# Altium PCB 飞控第二代.PcbDoc (part 2 of 2)
Units mm, origin at the board's own origin, x right, y up, seen from the top; angles counter-clockwise.
Board outline 41.02 x 41.02 mm, 2 copper layers (Top Layer, Bottom Layer); 37 components, 89 nets, 240 pads, 89 vias.
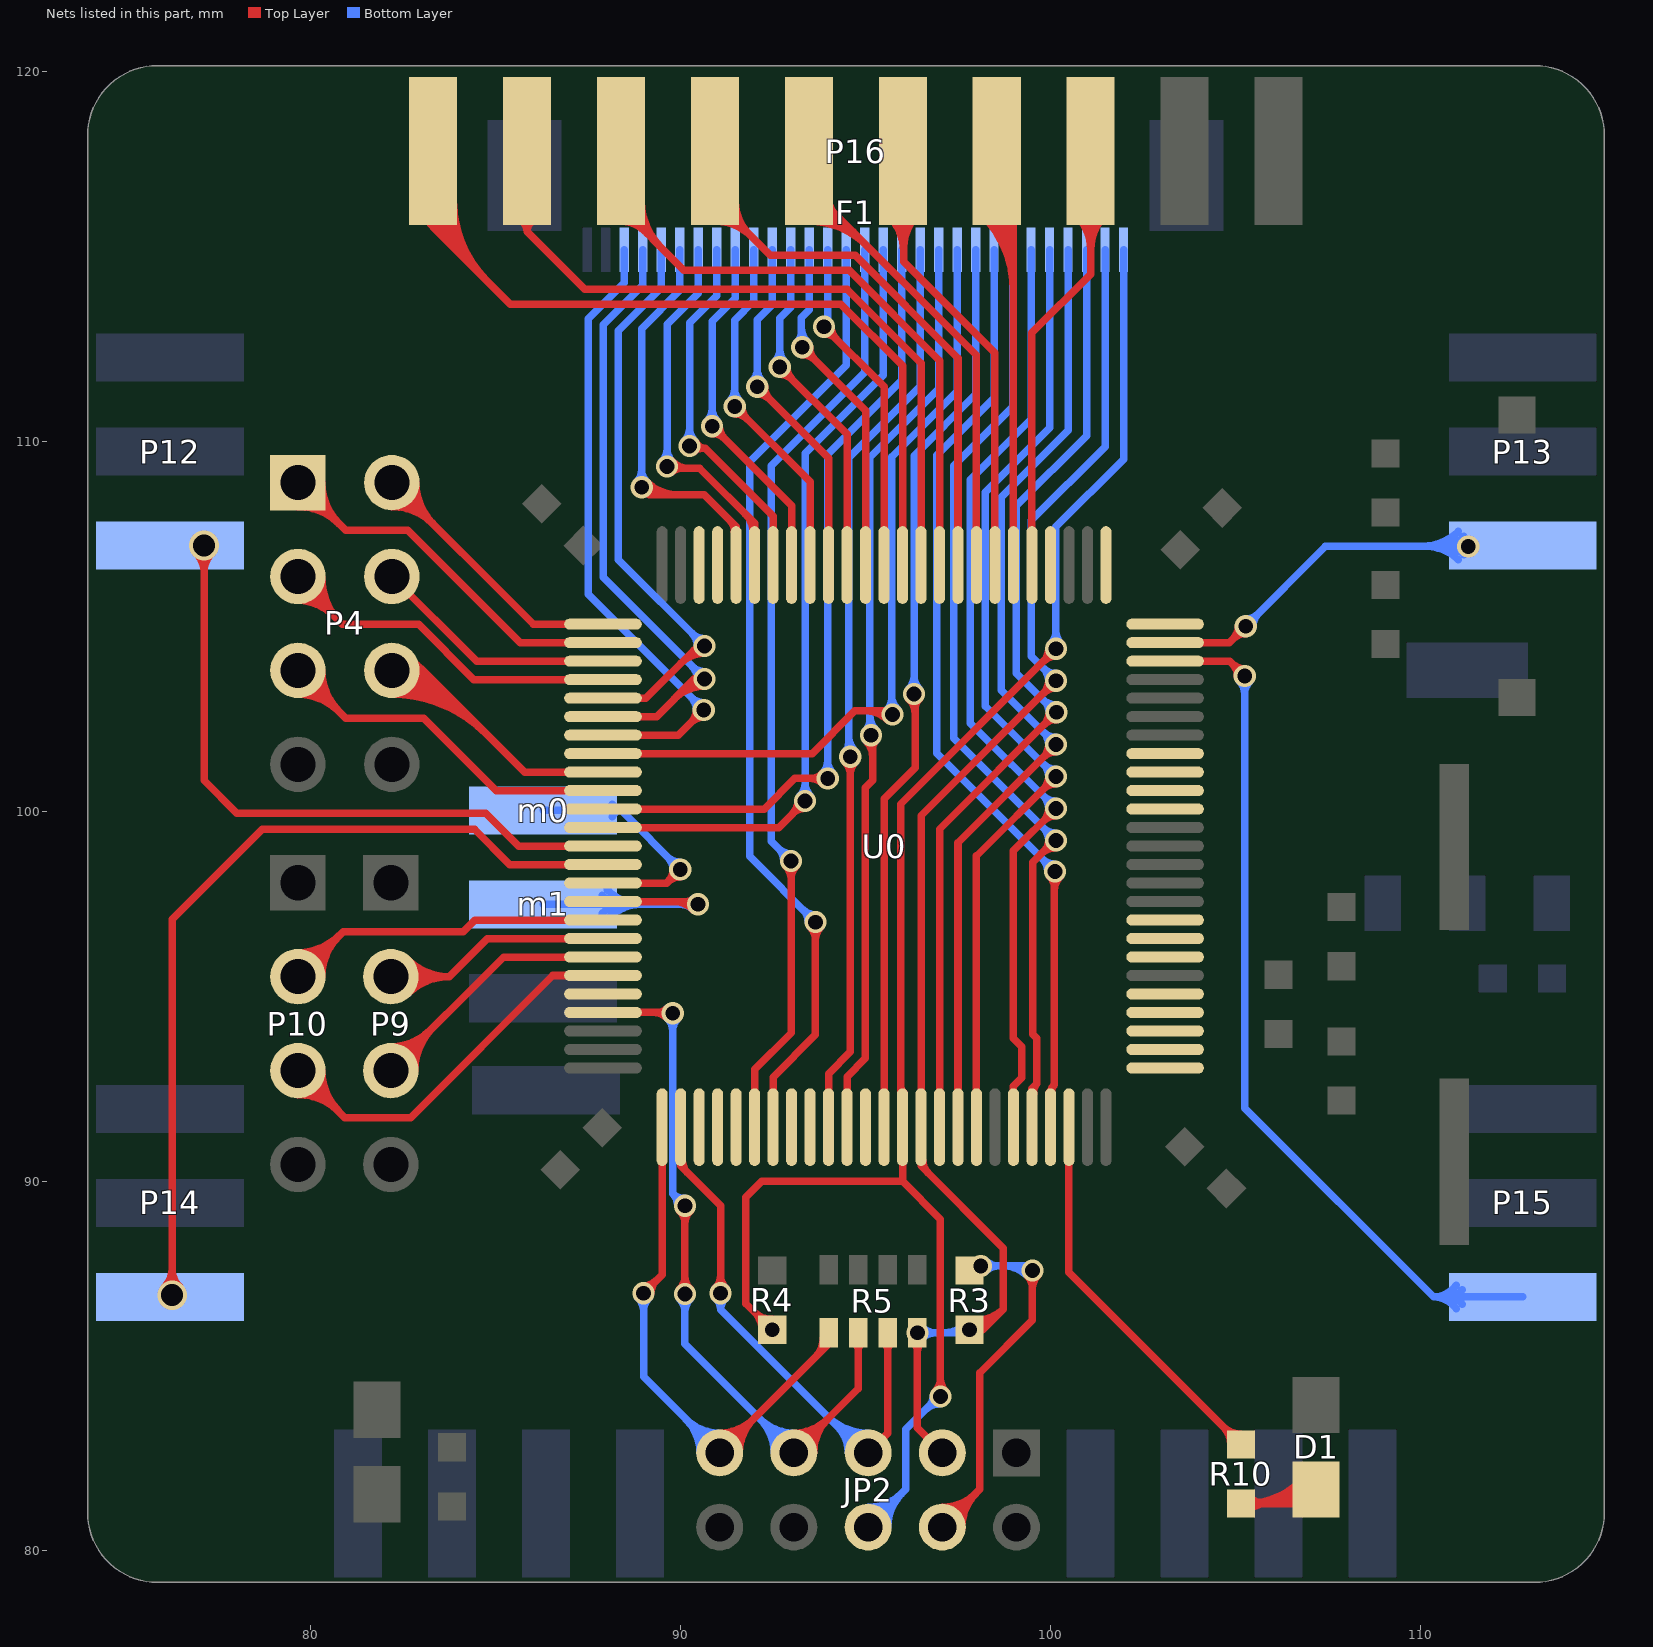
[diagram p2: the nets of this part, all layers, seen from the top]

## Via types
v1: diameter 0.6, hole 0.4, Top Layer to Bottom Layer, tented both sides, 74 vias
v2: diameter 0.8, hole 0.6, Top Layer to Bottom Layer, tented both sides, 11 vias
v3: diameter 5, hole 3.2, Top Layer to Bottom Layer, 4 vias

## Nets (pads, with @x,y where several pads share a name; then routed paths per layer and width w, separated by ;. In a path a pad name is that pad's centre, name@x,y a point inside that pad or via, vN(x,y) a via of type N, cw(c..) or ccw(c..) an arc to the next point about the centre after c; other vN are vias at no path point) (continued)
NetD1_1: D1.1 R10.1 | length 7
  Top Layer w0.203: R10.1@105.156,81.28 D1.1@106.807,81.28 ; R10.1@105.287,81.28 ccw(c105.287,83.435) D1.1@106.811,81.911 ; R10.1@105.354,81.082 cw(c105.831,80.605) 105.831,81.28 cw(c105.831,81.955) R10.1@105.354,81.478 ; 105.778,81.28 ccw(c105.778,82.944) D1.1@106.955,81.767 ; 106.268,81.28 ccw(c106.268,82.454) D1.1@107.098,81.624 ; 106.513,81.28 cw(c106.513,80.859) D1.1@106.811,81.157
NetJP2_4: JP2.4 R3.1 | length 15
  Top Layer w0.203: JP2.4@97.079,80.645 98.095,81.661 98.095,84.811 99.517,86.233 v1(99.517,87.579) ; JP2.4@97.079,80.975 ccw(c97.079,81.772) 97.642,81.209 ccw(c98.206,80.645) JP2.4@97.409,80.645 ; JP2.4@97.079,81.178 ccw(c97.079,82.466) 97.989,81.556 ccw(c98.9,80.645) JP2.4@97.612,80.645 ; v1@99.377,87.439 cw(c99.038,87.1) 99.517,87.1 cw(c99.996,87.1) v1@99.657,87.439
  Bottom Layer w0.203: v1(98.12,87.706) v1@99.39,87.706 ; v1@98.26,87.566 cw(c98.599,87.227) 98.599,87.706 cw(c98.599,88.185) v1@98.26,87.846 ; 98.732,87.706 cw(c98.732,86.794) v1@99.377,87.439 ; 99.222,87.706 cw(c99.222,87.284) v1@99.521,87.583
PA0: P15.1 U0.23 | length 27.5
  Top Layer w0.203: U0.23@103.104,104.06 104.855,104.06 v1(105.258,103.657) ; v1@105.059,103.657 ccw(c104.58,103.657) 104.919,103.996 ccw(c105.258,104.335) v1@105.258,103.856
  Bottom Layer w0.203: v1@105.117,103.517 cw(c104.779,103.178) 105.258,103.178 cw(c105.737,103.178) v1@105.398,103.517 ; v1(105.258,103.657) 105.258,91.973 110.363,86.868 ; P15.1@110.979,86.55 ccw(c110.363,86.112) 110.363,86.868 ; P15.1@110.979,87.186 cw(c110.363,87.624) 110.363,86.868 ; P15.1@111.145,86.668 ccw(c110.757,86.392) 110.757,86.868 ccw(c110.757,87.344) P15.1@111.145,87.068 ; P15.1@112.776,86.868 110.363,86.868
PA1: P13.1 U0.24 | length 14.9
  Top Layer w0.203: U0.24@103.104,104.56 104.839,104.56 v1(105.283,105.004) ; v1@105.085,105.004 cw(c104.606,105.004) 104.944,104.665 cw(c105.283,104.326) v1@105.283,104.805
  Bottom Layer w0.203: v1(105.283,105.004) 107.442,107.163 v1(111.303,107.163) ; v1@105.283,105.202 ccw(c105.283,105.681) 105.622,105.342 ccw(c105.96,105.004) v1@105.481,105.004 ; 110.041,107.163 ccw(c110.041,108.573) P13.1@111.038,107.576 ; 110.163,107.163 cw(c110.163,105.925) P13.1@111.038,106.8 ; 110.531,107.163 ccw(c110.531,108.083) P13.1@111.182,107.432 ; 110.654,107.163 cw(c110.654,106.416) P13.1@111.182,106.944 ; P13.1@111.163,107.022 ccw(c110.824,106.684) 110.824,107.163 ccw(c110.824,107.642) P13.1@111.163,107.303
PA2: U0.25
PA3: U0.26
PA4: U0.29
PA5: P16.8 U0.30 | length 15.2
  Top Layer w0.203: U0.30@99.504,106.66 99.504,112.941 101.092,114.529 P16.8@101.092,117.856 ; P16.8@100.704,116.118 cw(c99.768,115.182) 101.092,115.182 cw(c102.416,115.182) P16.8@101.48,116.118 ; P16.8@100.848,116.262 cw(c100.259,115.673) 101.092,115.673 cw(c101.925,115.673) P16.8@101.336,116.262
PA6: P16.7 U0.31 | length 18.1
  Top Layer w0.203: P16.7@98.164,116.118 cw(c96.137,114.091) 99.004,114.091 ; P16.7@98.308,116.262 cw(c96.627,114.581) 99.004,114.581 ; P16.7@98.452,116.406 cw(c97.118,115.072) 99.004,115.072 ; P16.7@98.552,117.856 99.004,117.404 U0.31@99.004,106.66 ; P16.7@98.595,116.549 cw(c97.609,115.563) 99.004,115.563
PA7: P16.6 U0.32 | length 15.8
  Top Layer w0.203: P16.6@95.624,116.118 cw(c94.627,115.121) 96.037,115.121 ; P16.6@95.768,116.262 cw(c95.117,115.611) 96.037,115.611 ; 96.037,115.243 cw(c97.275,115.243) P16.6@96.4,116.118 ; 96.037,115.734 cw(c96.784,115.734) P16.6@96.256,116.262 ; P16.6@96.52,117.856 96.037,117.373 96.037,114.865 98.504,112.398 U0.32@98.504,106.66
PA8: P10.2 U0.67 | length 13
  Top Layer w0.203: P10.2@79.654,95.529 80.874,96.749 84.125,96.749 84.436,97.06 U0.67@87.904,97.06 ; P10.2@79.654,95.975 ccw(c79.654,97.049) 80.414,96.289 ccw(c81.174,95.529) P10.2@80.1,95.529 ; P10.2@79.654,96.178 ccw(c79.654,97.743) 80.761,96.636 ccw(c81.868,95.529) P10.2@80.303,95.529
PA9: P9.2 U0.68 | length 10.3
  Top Layer w0.203: P9.2@82.167,95.529 83.744,95.529 84.774,96.56 U0.68@87.904,96.56 ; P9.2@82.482,95.215 cw(c83.242,94.455) 83.242,95.529 cw(c83.242,96.604) P9.2@82.482,95.844 ; P9.2@82.626,95.071 cw(c83.733,93.964) 83.733,95.529 cw(c83.733,97.095) P9.2@82.626,95.988
PA10: P9.3 U0.69 | length 11.2
  Top Layer w0.203: P9.3@82.167,92.989 82.167,93.013 85.214,96.06 U0.69@87.904,96.06 ; P9.3@82.167,93.435 ccw(c82.167,94.452) 82.887,93.733 ; P9.3@82.167,93.638 ccw(c82.167,95.146) 83.234,94.079 ; P9.3@82.613,92.989 cw(c83.745,92.989) 82.944,93.79 ; P9.3@82.816,92.989 cw(c84.439,92.989) 83.291,94.137
PA11: P10.3 U0.70 | length 14.5
  Top Layer w0.203: P10.3@79.654,92.341 cw(c79.654,90.776) 80.761,91.883 cw(c81.868,92.989) P10.3@80.303,92.989 ; P10.3@79.654,92.544 cw(c79.654,91.469) 80.414,92.229 cw(c81.174,92.989) P10.3@80.1,92.989 ; P10.3@79.654,92.989 80.924,91.719 82.702,91.719 86.543,95.56 U0.70@87.904,95.56
PA12: U0.71
PA13: JP2.7 R5.2 U0.72 | length 30.7
  Top Layer w0.203: U0.72@87.904,94.56 v1@89.789,94.56 ; 89.259,94.56 cw(c89.259,94.009) v1@89.649,94.399 ; 89.361,94.56 ccw(c89.361,94.967) v1@89.649,94.679 ; v1@89.979,87.084 ccw(c89.64,87.423) 90.119,87.423 ccw(c90.598,87.423) v1@90.259,87.084 ; v1@89.979,89.192 cw(c89.64,88.853) 90.119,88.853 cw(c90.598,88.853) v1@90.259,89.192 ; v1(90.119,86.944) v1(90.119,89.332) ; JP2.7@93.066,82.652 94.805,84.391 R5.2@94.805,85.897 ; JP2.7@93.066,82.982 ccw(c93.066,83.779) 93.629,83.215 ccw(c94.193,82.652) JP2.7@93.396,82.652 ; JP2.7@93.066,83.185 ccw(c93.066,84.473) 93.976,83.562 ccw(c94.887,82.652) JP2.7@93.599,82.652 ; R5.2@94.7,85.642 cw(c94.447,85.389) 94.805,85.389 cw(c95.164,85.389) R5.2@94.91,85.642
  Bottom Layer w0.203: v1@89.649,94.399 cw(c89.31,94.06) 89.789,94.06 cw(c90.268,94.06) v1@89.929,94.399 ; v1(89.789,94.539) 89.789,89.662 ; v1@89.921,89.335 ccw(c89.471,89.344) 89.789,89.662 ; v1@89.979,86.804 cw(c89.64,86.465) 90.119,86.465 cw(c90.598,86.465) v1@90.259,86.804 ; v1@90.116,89.53 cw(c90.107,89.98) 89.789,89.662 ; v1(90.119,86.944) 90.119,85.598 JP2.7@93.066,82.652 ; v1(90.119,89.332) 89.789,89.662 ; JP2.7@92.532,82.652 ccw(c91.244,82.652) 92.155,83.562 ccw(c93.066,84.473) JP2.7@93.066,83.185 ; JP2.7@92.735,82.652 ccw(c91.938,82.652) 92.502,83.215 ccw(c93.066,83.779) JP2.7@93.066,82.982
PA14: JP2.9 R5.1 U0.76 | length 23
  Top Layer w0.203: v1(89.002,86.97) 89.504,87.472 U0.76@89.504,91.46 ; v1@89.002,87.168 ccw(c89.002,87.647) 89.34,87.308 ccw(c89.679,86.97) v1@89.2,86.97 ; JP2.9@91.059,82.652 94.005,85.598 R5.1@94.005,85.897 ; JP2.9@91.059,82.982 ccw(c91.059,83.779) 91.623,83.215 ccw(c92.186,82.652) JP2.9@91.389,82.652 ; JP2.9@91.059,83.185 ccw(c91.059,84.473) 91.97,83.562 ccw(c92.88,82.652) JP2.9@91.592,82.652 ; 93.647,85.239 ccw(c93.139,85.747) R5.1@93.857,85.747
  Bottom Layer w0.203: v1@88.861,86.829 cw(c88.523,86.491) 89.002,86.491 cw(c89.481,86.491) v1@89.142,86.829 ; v1(89.002,86.97) 89.002,84.709 JP2.9@91.059,82.652 ; JP2.9@90.526,82.652 ccw(c89.238,82.652) 90.148,83.562 ccw(c91.059,84.473) JP2.9@91.059,83.185 ; JP2.9@90.729,82.652 ccw(c89.932,82.652) 90.495,83.215 ccw(c91.059,83.779) JP2.9@91.059,82.982
PA15: JP2.5 R5.3 U0.77 | length 19.7
  Top Layer w0.203: U0.77@90.004,91.46 90.004,90.412 91.084,89.332 v1(91.084,86.97) ; U0.77@90.052,90.56 ccw(c90.526,90.56) 90.191,90.225 ; v1@90.944,87.11 ccw(c90.605,87.449) 91.084,87.449 ccw(c91.563,87.449) v1@91.225,87.11 ; JP2.5@95.072,82.652 95.605,83.185 R5.3@95.605,85.897 ; R5.3@95.5,85.642 cw(c95.247,85.389) 95.605,85.389 cw(c95.964,85.389) R5.3@95.71,85.642
  Bottom Layer w0.203: v1@90.952,86.822 cw(c90.686,86.525) 91.084,86.525 ; v1(91.084,86.97) 91.084,86.525 ; v1@91.217,86.822 ccw(c91.483,86.525) 91.084,86.525 ; 93.967,83.643 ccw(c95.072,84.748) JP2.5@95.072,83.185 ; 94.242,83.367 cw(c93.527,82.652) JP2.5@94.539,82.652 ; 94.314,83.296 ccw(c95.072,84.055) JP2.5@95.072,82.982 ; JP2.5@95.072,82.652 94.958,82.652 91.084,86.525
PB0: P16.3 U0.35 | length 19.6
  Top Layer w0.203: P16.3@88.367,116.357 90.094,114.63 94.562,114.63 97.004,112.188 U0.35@97.004,106.66 ; P16.3@88.392,115.958 cw(c88.392,115.054) 89.031,115.693 ; P16.3@88.534,116.506 ccw(c89.297,116.506) P16.3@88.757,115.967 ; P16.3@88.737,116.506 ccw(c89.991,116.506) 89.104,115.62 ; P16.3@88.94,116.506 ccw(c90.684,116.506) 89.451,115.273
PB1: P16.2 U0.36 | length 20.6
  Top Layer w0.203: P16.2@85.634,116.003 cw(c85.491,115.672) 85.852,115.672 ; P16.2@85.852,117.856 85.852,115.672 ; P16.2@86.07,116.003 ccw(c86.213,115.672) 85.852,115.672 ; U0.36@96.504,106.66 96.504,112.118 94.503,114.119 87.405,114.119 85.852,115.672
PB2: P16.1 U0.37 | length 30.7
  Top Layer w0.203: P16.1@83.048,116.506 ccw(c84.117,116.506) 83.361,115.75 ; P16.1@83.251,116.506 ccw(c84.811,116.506) 83.708,115.403 ; P16.1@83.312,117.856 83.312,115.799 ; P16.1@83.454,116.506 ccw(c85.505,116.506) 84.055,115.056 ; P16.1@83.657,116.506 ccw(c86.198,116.506) 84.401,114.709 ; P16.1@83.86,116.506 ccw(c86.892,116.506) 84.748,114.362 ; U0.37@96.004,106.66 96.004,112.047 94.336,113.716 85.395,113.716 83.312,115.799 ; 83.312,115.799 cw(c83.494,115.799) 83.449,115.975 ccw(c83.494,115.799) 83.312,115.799 ; 83.312,115.799 ccw(c83.13,115.799) 83.175,115.975 cw(c83.13,115.799) 83.312,115.799
PB3: F1.1 JP2.6 R4.2 U0.89 | length 55
  Top Layer w0.203: R4.2@92.202,85.979 ccw(c91.527,85.979) 92.004,86.456 ccw(c92.481,86.933) R4.2@92.481,86.258 ; R4.2@92.283,85.979 ccw(c91.804,85.979) 92.143,86.318 ccw(c92.481,86.656) R4.2@92.481,86.177 ; v1(92.481,85.979) 91.77,86.69 91.77,89.56 92.202,89.992 96.004,89.992 ; 95.956,92.594 ccw(c96.238,92.594) U0.89@96.038,92.394 ; v1@96.888,84.316 ccw(c96.549,84.655) 97.028,84.655 ccw(c97.507,84.655) v1@97.168,84.316 ; v1(97.028,84.176) 97.028,88.968 96.004,89.992 ; v1@99.954,104.394 cw(c99.475,104.394) 99.814,104.055 cw(c100.152,103.717) v1@100.152,104.196 ; v1(100.152,104.394) 95.956,100.197 95.956,91.508 U0.89@96.004,91.46 96.004,89.992
  Bottom Layer w0.203: JP2.6@95.072,80.645 96.088,81.661 96.088,83.287 v1@97.028,84.226 ; JP2.6@95.072,80.975 ccw(c95.072,81.772) 95.636,81.209 ccw(c96.2,80.645) JP2.6@95.402,80.645 ; JP2.6@95.072,81.178 ccw(c95.072,82.466) 95.983,81.556 ccw(c96.893,80.645) JP2.6@95.606,80.645 ; 96.603,83.801 cw(c97.028,83.376) v1@97.028,83.977 ; 96.725,83.924 ccw(c96.473,84.176) v1@96.83,84.176 ; v1@100.012,104.534 ccw(c99.673,104.873) 100.152,104.873 ccw(c100.631,104.873) v1@100.292,104.534 ; v1(100.152,104.394) 100.152,107.696 101.981,109.525 F1.1@101.981,115.189
PB4: F1.2 JP2.3 R3.2 R5.4 U0.90 | length 46.4
  Top Layer w0.203: R5.4@96.265,85.757 cw(c95.926,85.418) 96.405,85.418 cw(c96.884,85.418) R5.4@96.546,85.757 ; R5.4@96.3,85.642 cw(c96.047,85.389) 96.405,85.389 cw(c96.764,85.389) R5.4@96.51,85.642 ; v1(96.405,85.897) 96.405,83.325 JP2.3@97.079,82.652 ; U0.90@96.552,90.56 ccw(c97.02,90.56) 96.689,90.229 ; R3.2@97.815,85.974 ccw(c97.839,86.763) 98.397,86.205 ; v1(97.815,85.979) R3.2@98.171,85.979 ; R3.2@97.821,86.177 ccw(c97.858,87.409) 98.73,86.538 ; R3.2@97.827,86.054 ccw(c97.94,86.764) 98.448,86.256 ; R3.2@97.859,86.255 ccw(c98.017,87.251) 98.73,86.538 ; R3.2@97.984,85.875 cw(c98.171,85.76) R3.2@98.171,85.979 ; R3.2@97.984,86.083 ccw(c98.171,86.198) R3.2@98.171,85.979 ; v1@99.954,103.53 cw(c99.475,103.53) 99.814,103.192 cw(c100.152,102.853) v1@100.152,103.332 ; v1(100.152,103.53) 96.504,99.882 U0.90@96.504,91.46 96.504,90.415 98.73,88.189 98.73,86.538 ; R3.2@98.171,85.979 98.73,86.538
  Bottom Layer w0.203: v1(96.405,85.897) v1@97.734,85.897 ; v1@96.546,85.757 cw(c96.884,85.418) 96.884,85.897 cw(c96.884,86.376) v1@96.546,86.037 ; 97.139,85.897 ccw(c97.139,86.655) v1@97.675,86.119 ; v1@99.954,103.53 ccw(c99.475,103.53) 99.814,103.869 ccw(c100.152,104.208) v1@100.152,103.729 ; v1(100.152,103.53) 99.489,104.194 99.489,107.871 101.481,109.863 F1.2@101.481,115.189
PB5: F1.3 U0.91 | length 27.8
  Top Layer w0.203: U0.91@97.004,91.46 97.004,99.519 v1(100.165,102.679) ; v1@99.967,102.679 cw(c99.488,102.679) 99.826,102.341 cw(c100.165,102.002) v1@100.165,102.481
  Bottom Layer w0.203: 99.783,103.036 ccw(c100.165,103.418) v1@100.165,102.878 ; 99.844,102.975 cw(c99.549,102.679) v1@99.967,102.679 ; v1@100.152,102.667 99.085,103.734 99.085,108.258 100.981,110.154 F1.3@100.981,115.189
PB6: F1.4 U0.92 | length 27.7
  Top Layer w0.203: U0.92@97.504,91.46 97.504,99.155 v1(100.152,101.803) ; v1@99.954,101.803 cw(c99.475,101.803) 99.814,101.465 cw(c100.152,101.126) v1@100.152,101.605
  Bottom Layer w0.203: v1@99.954,101.803 ccw(c99.475,101.803) 99.814,102.142 ccw(c100.152,102.481) v1@100.152,102.002 ; v1(100.152,101.803) 98.679,103.276 98.679,108.497 100.481,110.299 F1.4@100.481,115.189
PB7: F1.5 U0.93 | length 27.6
  Top Layer w0.203: U0.93@98.004,91.46 98.004,98.791 v1(100.152,100.94) ; v1@99.954,100.94 cw(c99.475,100.94) 99.814,100.601 cw(c100.152,100.262) v1@100.152,100.741
  Bottom Layer w0.203: v1@99.954,100.94 ccw(c99.475,100.94) 99.814,101.278 ccw(c100.152,101.617) v1@100.152,101.138 ; F1.5@99.981,115.189 99.981,110.37 98.244,108.633 98.244,102.848 v1(100.152,100.94)
PB8: F1.6 U0.95 | length 27.5
  Top Layer w0.203: U0.95@99.004,91.46 99.004,92.569 99.23,92.795 99.23,93.632 99.004,93.858 99.004,98.928 v1(100.152,100.076) ; v1@99.954,100.076 cw(c99.475,100.076) 99.814,99.737 cw(c100.152,99.399) v1@100.152,99.878
  Bottom Layer w0.203: F1.6@99.481,115.189 99.481,110.609 97.841,108.969 97.841,102.387 v1(100.152,100.076) ; v1@99.954,100.076 ccw(c99.475,100.076) 99.814,100.415 ccw(c100.152,100.753) v1@100.152,100.274
PB9: F1.7 U0.96 | length 27.7
  Top Layer w0.203: U0.96@99.504,91.46 99.504,92.499 99.633,92.628 ; U0.96@99.552,92.369 cw(c99.84,92.42) 99.633,92.628 ; 99.749,98.847 cw(c100.152,98.443) v1@100.152,99.014 ; 99.84,98.939 ccw(c99.567,99.212) v1@99.954,99.212 ; v1(100.152,99.212) 99.916,98.976 99.878,98.976 99.525,98.623 99.525,93.972 99.633,93.864 99.633,92.628
  Bottom Layer w0.203: F1.7@98.981,115.189 98.981,110.944 97.384,109.347 97.384,101.981 v1(100.152,99.212) ; v1@99.954,99.212 ccw(c99.475,99.212) 99.814,99.551 ccw(c100.152,99.89) v1@100.152,99.411
PB10: U0.47
PB11: U0.48
PB12: P4.2 U0.51 | length 11.4
  Top Layer w0.203: P4.2@82.194,108.241 cw(c82.194,106.676) 83.301,107.783 cw(c84.408,108.89) P4.2@82.843,108.89 ; P4.2@82.194,108.445 cw(c82.194,107.37) 82.954,108.13 cw(c83.714,108.89) P4.2@82.64,108.89 ; P4.2@82.194,108.89 86.024,105.06 U0.51@87.904,105.06
PB13: P4.1 U0.52 | length 14.2
  Top Layer w0.203: P4.1@79.654,108.241 cw(c79.654,106.676) 80.761,107.783 cw(c81.868,108.89) P4.1@80.303,108.89 ; P4.1@79.654,108.445 cw(c79.654,107.37) 80.414,108.13 cw(c81.174,108.89) P4.1@80.1,108.89 ; P4.1@79.654,108.89 80.95,107.594 82.626,107.594 85.661,104.56 U0.52@87.904,104.56
PB14: P4.4 U0.53 | length 6.7
  Top Layer w0.203: P4.4@82.194,106.35 84.484,104.06 U0.53@87.904,104.06
PB15: P4.3 U0.54 | length 13.5
  Top Layer w0.203: P4.3@79.604,106.299 80.848,105.054 82.92,105.054 84.414,103.56 U0.54@87.904,103.56 ; P4.3@79.654,105.701 cw(c79.654,104.381) 80.588,105.315 ; P4.3@79.654,105.905 cw(c79.654,105.075) 80.241,105.662 ; P4.3@80.099,106.34 ccw(c81.333,106.314) 80.461,105.442 ; P4.3@80.303,106.336 ccw(c81.993,106.3) 80.797,105.105
PC0: U0.15
PC1: U0.16
PC2: U0.17
PC3: U0.18
PC4: P16.5 U0.33 | length 15.7
  Top Layer w0.203: P16.5@93.472,115.958 cw(c93.472,113.778) 95.013,115.319 ; P16.5@93.472,116.161 cw(c93.472,114.472) 94.666,115.666 ; P16.5@93.472,116.364 cw(c93.472,115.166) 94.319,116.013 ; P16.5@93.98,116.352 98.004,112.328 U0.33@98.004,106.66 ; P16.5@94.02,116.506 ccw(c94.489,116.506) 94.158,116.175
PC5: P16.4 U0.34 | length 17.4
  Top Layer w0.203: P16.4@90.907,116.561 92.431,115.037 94.725,115.037 97.504,112.258 U0.34@97.504,106.66 ; P16.4@90.932,115.958 cw(c90.932,114.563) 91.918,115.549 ; P16.4@90.932,116.161 cw(c90.932,115.257) P16.4@91.571,115.896 ; P16.4@91.277,116.506 ccw(c92.04,116.506) P16.4@91.501,115.967 ; P16.4@91.48,116.506 ccw(c92.734,116.506) 91.848,115.62
PC6: P12.1 U0.63 | length 19
  Top Layer w0.203: v2@76.903,106.977 cw(c76.394,106.468) 77.114,106.468 cw(c77.835,106.468) v2@77.325,106.977 ; v2(77.114,107.188) 77.114,100.838 78.003,99.949 84.734,99.949 85.623,99.06 U0.63@87.904,99.06
PC7: P14.1 U0.64 | length 24.4
  Top Layer w0.203: v2@76.04,87.13 ccw(c75.53,87.639) 76.251,87.639 ccw(c76.971,87.639) v2@76.462,87.13 ; v2(76.251,86.919) 76.251,97.079 78.689,99.517 84.43,99.517 85.387,98.56 U0.64@87.904,98.56
PC8: m0.1 U0.65 | length 8.7
  Top Layer w0.203: U0.65@87.904,98.06 89.627,98.06 v1(89.992,98.425) ; v1@89.794,98.425 cw(c89.315,98.425) 89.654,98.086 cw(c89.992,97.748) v1@89.992,98.227
  Bottom Layer w0.203: m0.1@86.284,100.025 88.392,100.025 ; m0.1@88.155,99.854 cw(c88.392,99.775) 88.392,100.025 ; m0.1@88.155,100.197 ccw(c88.392,100.275) 88.392,100.025 ; v1@89.794,98.425 ccw(c89.315,98.425) 89.654,98.764 ccw(c89.992,99.102) v1@89.992,98.623 ; v1(89.992,98.425) 88.392,100.025
PC9: m1.1 U0.66 | length 11.7
  Top Layer w0.203: U0.66@87.904,97.56 v1@90.5,97.56 ; 89.815,97.56 cw(c89.815,96.826) v1@90.335,97.345 ; 90.176,97.56 ccw(c90.176,97.784) v1@90.335,97.625
  Bottom Layer w0.203: m1.1@86.284,97.485 v1(90.475,97.485) ; m1.1@87.878,97.241 cw(c88.467,96.652) 88.467,97.485 cw(c88.467,98.319) m1.1@87.878,97.729 ; m1.1@88.022,97.097 cw(c88.958,96.161) 88.958,97.485 cw(c88.958,98.809) m1.1@88.022,97.873 ; v1@90.335,97.345 ccw(c89.996,97.006) 89.996,97.485 ccw(c89.996,97.964) v1@90.335,97.625
PC10: U0.78
PC11: U0.79
PC12: U0.80
PC13: U0.7
PC14: U0.8
PC15: U0.9
PD0: F1.15 U0.81 | length 26.9
  Top Layer w0.203: U0.81@92.004,91.46 92.004,93.02 92.989,94.005 v1(92.989,98.654) ; v1@92.849,98.513 cw(c92.51,98.175) 92.989,98.175 cw(c93.468,98.175) v1@93.13,98.513
  Bottom Layer w0.203: v1@92.791,98.654 ccw(c92.312,98.654) 92.651,98.992 ccw(c92.989,99.331) v1@92.989,98.852 ; v1(92.989,98.654) 92.456,99.187 92.456,109.347 94.981,111.872 F1.15@94.981,115.189
PD1: F1.16 U0.82 | length 27.5
  Top Layer w0.203: U0.82@92.504,91.46 92.504,92.809 93.65,93.955 v1(93.65,97.003) ; v1@93.51,96.862 cw(c93.171,96.524) 93.65,96.524 cw(c94.129,96.524) v1@93.79,96.862
  Bottom Layer w0.203: v1@93.451,97.003 ccw(c92.972,97.003) 93.311,97.341 ccw(c93.65,97.68) v1@93.65,97.201 ; v1(93.65,97.003) 91.872,98.781 91.872,109.449 94.481,112.058 F1.16@94.481,115.189
PD2: U0.83
PD3: U0.84
PD4: F1.12 U0.85 | length 26.3
  Top Layer w0.203: U0.85@94.004,91.46 94.004,92.909 94.59,93.494 v1(94.59,101.473) ; v1@94.449,101.333 cw(c94.111,100.994) 94.59,100.994 cw(c95.069,100.994) v1@94.73,101.333
  Bottom Layer w0.203: v1@94.449,101.613 ccw(c94.214,101.849) 94.547,101.849 ; v1@94.547,101.473 94.547,109.561 96.481,111.496 F1.12@96.481,115.189 ; 94.547,102.055 ccw(c95.172,102.055) v1@94.73,101.613
PD5: F1.11 U0.86 | length 26.1
  Top Layer w0.203: U0.86@94.504,91.46 94.504,92.828 94.996,93.32 94.996,100.635 95.199,100.838 v1@95.199,101.956 ; v1@95.008,101.917 cw(c94.547,101.456) 95.199,101.456 ; 95.199,101.701 cw(c95.505,101.701) v1@95.289,101.917
  Bottom Layer w0.203: v1@95.008,102.197 ccw(c94.731,102.475) 95.123,102.475 ; v1@95.123,102.159 95.123,109.567 96.981,111.425 F1.11@96.981,115.189 ; 95.123,102.597 ccw(c95.689,102.597) v1@95.289,102.197
  other v1: 95.148,102.057
PD6: U0.87
PD7: F1.9 U0.88 | length 26.2
  Top Layer w0.203: U0.88@95.504,91.46 95.504,100.344 96.342,101.182 v1@96.342,103.124 ; v1@96.177,103.035 cw(c95.777,102.635) 96.342,102.635 ; 96.342,102.757 cw(c96.734,102.757) v1@96.457,103.035
  Bottom Layer w0.203: v1@96.177,103.315 ccw(c95.838,103.654) 96.317,103.654 ccw(c96.796,103.654) v1@96.457,103.315 ; v1(96.317,103.175) 96.317,109.621 97.981,111.285 F1.9@97.981,115.189
PD8: F1.26 U0.55 | length 17.1
  Top Layer w0.203: U0.55@87.904,103.06 89.065,103.06 v1@90.475,104.47 ; 90.01,104.006 cw(c90.653,103.364) v1@90.653,104.272 ; 90.357,104.353 cw(c90.653,104.057) v1@90.653,104.475
  Bottom Layer w0.203: F1.26@89.481,115.189 89.481,114.156 88.316,112.991 88.316,106.807 v1(90.653,104.47) ; v1@90.454,104.47 ccw(c89.975,104.47) 90.314,104.809 ccw(c90.653,105.148) v1@90.653,104.669
PD9: F1.27 U0.56 | length 18.5
  Top Layer w0.203: U0.56@87.904,102.56 89.352,102.56 90.373,103.581 v1(90.653,103.581) ; 89.837,103.045 cw(c90.653,102.229) v1@90.653,103.383 ; 90.184,103.392 cw(c90.653,102.923) v1@90.653,103.586
  Bottom Layer w0.203: F1.27@88.981,115.188 88.981,114.226 87.909,113.154 87.909,106.324 v1(90.653,103.581) ; v1@90.454,103.581 ccw(c89.975,103.581) 90.314,103.92 ccw(c90.653,104.259) v1@90.653,103.78
PD10: F1.28 U0.57 | length 18.7
  Top Layer w0.203: U0.57@87.904,102.06 89.944,102.06 v1(90.627,102.743) ; v1@90.429,102.743 cw(c89.95,102.743) 90.289,102.404 cw(c90.627,102.066) v1@90.627,102.545
  Bottom Layer w0.203: F1.28@88.481,115.188 88.481,114.296 87.506,113.321 87.506,105.864 v1(90.627,102.743) ; v1@90.429,102.743 ccw(c89.95,102.743) 90.289,103.082 ccw(c90.627,103.42) v1@90.627,102.941
PD11: F1.10 U0.58 | length 23
  Top Layer w0.203: U0.58@87.904,101.56 93.559,101.56 94.717,102.718 95.631,102.718 v1(95.733,102.616) ; 95.008,102.718 cw(c95.008,101.892) v1@95.592,102.476
  Bottom Layer w0.203: v1@95.592,102.756 ccw(c95.315,103.034) 95.707,103.034 ; v1@95.707,102.692 95.707,109.581 97.481,111.355 F1.10@97.481,115.189 ; 95.707,103.156 ccw(c96.273,103.156) v1@95.873,102.756
PD12: P4.6 U0.59 | length 18
  Top Layer w0.203: P4.6@82.194,103.161 cw(c82.194,99.572) 84.732,102.11 ; P4.6@82.194,103.365 cw(c82.194,100.266) 84.385,102.457 ; P4.6@82.194,103.568 cw(c82.194,100.96) 84.038,102.804 ; P4.6@82.194,103.771 cw(c82.194,101.654) 83.692,103.151 ; P4.6@82.194,103.81 83.033,103.81 85.782,101.06 U0.59@87.904,101.06 ; P4.6@82.194,103.974 cw(c82.194,102.348) 83.345,103.498 ; P4.6@82.194,104.177 cw(c82.194,103.041) 82.998,103.845
PD13: P4.5 U0.60 | length 13.7
  Top Layer w0.203: P4.5@79.654,103.161 cw(c79.654,101.596) 80.761,102.703 cw(c81.868,103.81) P4.5@80.303,103.81 ; P4.5@79.654,103.365 cw(c79.654,102.29) 80.414,103.05 cw(c81.174,103.81) P4.5@80.1,103.81 ; P4.5@79.654,103.81 80.95,102.514 83.058,102.514 85.012,100.56 U0.60@87.904,100.56
PD14: F1.13 U0.61 | length 23.1
  Top Layer w0.203: U0.61@87.904,100.06 92.262,100.06 93.091,100.889 v1(93.98,100.889) ; v1@93.84,100.749 ccw(c93.501,100.41) 93.501,100.889 ccw(c93.501,101.368) v1@93.84,101.029
  Bottom Layer w0.203: v1@93.84,101.029 ccw(c93.501,101.368) 93.98,101.368 ccw(c94.459,101.368) v1@94.12,101.029 ; v1(93.98,100.889) 93.98,109.658 95.981,111.659 F1.13@95.981,115.189
PD15: F1.14 U0.62 | length 23.1
  Top Layer w0.203: U0.62@87.904,99.56 92.651,99.56 v1(93.37,100.279) ; v1@93.172,100.279 cw(c92.693,100.279) 93.032,99.941 cw(c93.37,99.602) v1@93.37,100.081
  Bottom Layer w0.203: v1@93.23,100.419 ccw(c92.891,100.758) 93.37,100.758 ccw(c93.849,100.758) v1@93.511,100.419 ; v1(93.37,100.279) 93.37,109.68 95.481,111.791 F1.14@95.481,115.189
PE0: F1.8 U0.97 | length 27.8
  Top Layer w0.203: U0.97@99.973,92.397 ccw(c99.863,92.531) 100.036,92.531 ; v1@99.987,98.234 cw(c99.69,97.937) 100.109,97.937 ; U0.97@100.004,91.46 100.036,91.492 100.036,92.531 ; v1@100.036,98.233 v1@100.109,98.306 ; U0.97@100.05,92.374 cw(c100.274,92.439) 100.109,92.604 ; 100.109,97.853 cw(c100.648,97.853) v1@100.267,98.234 ; v1(100.127,98.374) 100.152,98.349 v1@100.109,98.306 ; 100.036,92.531 100.109,92.604 ; 100.109,92.604 v1@100.109,98.306
  Bottom Layer w0.203: F1.8@98.481,115.189 98.481,111.184 96.926,109.63 96.926,101.575 v1@100.152,98.349 ; v1@99.928,98.374 ccw(c99.449,98.374) 99.788,98.713 ccw(c100.127,99.052) v1@100.127,98.573
PE1: R10.2 U0.98 | length 11.6
  Top Layer w0.203: U0.98@100.504,91.46 100.504,87.532 R10.2@105.156,82.88 ; R10.2@104.877,82.88 ccw(c104.202,82.88) 104.679,83.357 ccw(c105.156,83.834) R10.2@105.156,83.16
PE2: U0.1
PE3: U0.2
PE4: U0.3
PE5: U0.4
PE6: U0.5
PE7: F1.17 U0.38 | length 10
  Top Layer w0.203: v1@93.878,112.908 cw(c93.878,112.429) 94.217,112.768 cw(c94.556,113.106) v1@94.077,113.106 ; v1(93.878,113.106) 95.504,111.481 U0.38@95.504,106.66
  Bottom Layer w0.203: v1@93.981,113.106 F1.17@93.981,115.189
PE8: F1.18 U0.39 | length 10.8
  Top Layer w0.203: v1@93.294,112.349 cw(c93.294,111.87) 93.633,112.209 cw(c93.972,112.547) v1@93.493,112.547 ; v1(93.294,112.547) 95.004,110.838 U0.39@95.004,106.66
  Bottom Layer w0.203: v1@93.154,112.688 ccw(c92.877,112.965) 93.269,112.965 ; v1@93.269,112.547 93.269,113.347 93.481,113.56 F1.18@93.481,115.189 ; 93.269,113.088 ccw(c93.834,113.088) v1@93.434,112.688
PE9: F1.19 U0.40 | length 10.9
  Top Layer w0.203: v1@92.685,111.816 cw(c92.685,111.337) 93.023,111.675 cw(c93.362,112.014) v1@92.883,112.014 ; v1(92.685,112.014) 94.504,110.195 U0.40@94.504,106.66
  Bottom Layer w0.203: v1@92.544,112.154 ccw(c92.206,112.493) 92.685,112.493 ccw(c93.164,112.493) v1@92.825,112.154 ; v1(92.685,112.014) 92.685,113.333 92.981,113.63 F1.19@92.981,115.189
PE10: F1.20 U0.41 | length 11
  Top Layer w0.203: v1@92.075,111.282 cw(c92.075,110.803) 92.414,111.142 cw(c92.752,111.481) v1@92.273,111.481 ; v1(92.075,111.481) 94.004,109.552 U0.41@94.004,106.66
  Bottom Layer w0.203: v1@91.935,111.621 ccw(c91.596,111.96) 92.075,111.96 ccw(c92.554,111.96) v1@92.215,111.621 ; v1(92.075,111.481) 92.075,113.294 92.481,113.7 F1.20@92.481,115.189
PE11: F1.21 U0.42 | length 11.1
  Top Layer w0.203: v1@91.465,110.749 cw(c91.465,110.27) 91.804,110.609 cw(c92.143,110.947) v1@91.664,110.947 ; v1(91.465,110.947) 93.504,108.909 U0.42@93.504,106.66
  Bottom Layer w0.203: v1@91.325,111.087 ccw(c90.986,111.426) 91.465,111.426 ccw(c91.944,111.426) v1@91.606,111.087 ; v1(91.465,110.947) 91.465,113.284 91.981,113.8 F1.21@91.981,115.189
PE12: F1.22 U0.43 | length 11.2
  Top Layer w0.203: v1@90.856,110.215 cw(c90.856,109.736) 91.194,110.075 cw(c91.533,110.414) v1@91.054,110.414 ; v1(90.856,110.414) 93.004,108.266 U0.43@93.004,106.66
  Bottom Layer w0.203: v1@90.716,110.554 ccw(c90.377,110.893) 90.856,110.893 ccw(c91.335,110.893) v1@90.996,110.554 ; v1(90.856,110.414) 90.856,113.25 91.481,113.875 F1.22@91.481,115.189
PE13: F1.23 U0.44 | length 11.2
  Top Layer w0.203: v1(90.246,109.88) 90.314,109.812 90.67,109.812 ; v1@90.386,109.74 cw(c90.561,109.566) 90.561,109.812 ; v1@90.425,109.966 ccw(c90.67,110.084) 90.67,109.812 ; U0.44@92.504,106.66 92.504,107.978 90.67,109.812
  Bottom Layer w0.203: v1@90.106,110.021 ccw(c89.767,110.359) 90.246,110.359 ccw(c90.725,110.359) v1@90.386,110.021 ; v1(90.246,109.88) 90.246,113.21 90.981,113.945 F1.23@90.981,115.189
PE14: F1.24 U0.45 | length 12.2
  Top Layer w0.203: v1@89.777,109.181 cw(c89.993,108.965) 89.993,109.271 ; v1@89.777,109.462 ccw(c90.238,109.923) 90.238,109.271 ; v1@89.789,109.271 90.526,109.271 92.004,107.792 U0.45@92.004,106.66 ; 91.757,108.039 cw(c91.278,107.56) U0.45@91.956,107.56
  Bottom Layer w0.203: v1@89.496,109.462 ccw(c89.158,109.801) 89.637,109.801 ccw(c90.116,109.801) v1@89.777,109.462 ; v1(89.637,109.322) 89.637,113.171 90.481,114.015 F1.24@90.481,115.189
PE15: F1.25 U0.46 | length 13.4
  Top Layer w0.203: v1@88.947,108.759 ccw(c89.43,109.242) 89.43,108.56 ; v1(88.951,108.763) 89.154,108.56 90.643,108.56 91.504,107.699 U0.46@91.504,106.66 ; v1@89.091,108.903 ccw(c89.92,109.732) 89.92,108.56 ; 91.323,107.879 cw(c91.004,107.56) U0.46@91.456,107.56
  Bottom Layer w0.203: v1@88.811,108.903 ccw(c88.472,109.242) 88.951,109.242 ccw(c89.43,109.242) v1@89.091,108.903 ; v1(88.951,108.763) 88.951,113.055 89.981,114.086 F1.25@89.981,115.189
pads on no net: F1.0 U0.73
copper on no net:
  other v3: 76.81,81.991 112.141,81.991 76.81,117.323 112.141,117.323

## Keep-outs
Keep-Out Layer:
  the board outline again, w0.254

## Silkscreen, mask and mechanical layers (free items; w line width, h text height)
Top Overlay:
  text "B2" at 82.626,114.63 h0.8
  text "B1" at 85.183,114.63 h0.8
  text "B0" at 87.74,114.63 h0.8
  text "C5" at 90.297,114.63 h0.8
  text "C4" at 92.854,114.63 h0.8
  text "A7" at 95.411,114.63 h0.8
  text "A6" at 97.968,114.63 h0.8
  text "A5" at 100.525,114.63 h0.8
  text "3V" at 103.082,114.63 h0.8
  text "GND" at 105.639,114.63 h0.8
  text "GND" at 112.37,113.106 h0.8
  text "GND" at 74.371,111.811 h0.8
  text "5V" at 74.371,109.347 h0.8
  text "B12" at 83.896,109.169 h0.8
  text "B13" at 75.946,108.458 h0.8
  text "C6" at 74.371,106.883 h0.8
  text "B14" at 83.947,106.045 h0.8
  text "B15" at 75.946,105.926 h0.8
  text "D12" at 83.947,103.454 h0.8
  text "D13" at 75.946,103.395 h0.8
  text "A1" at 113.589,102.794 h0.8
  text "3V" at 76.612,100.863 h0.8
  text "GND" at 83.947,100.863 h0.8
  text "5V" at 83.998,97.815 h0.8
  text "5V" at 76.454,97.688 h0.8
  text "A9" at 83.998,95.275 h0.8
  text "A8" at 76.454,95.148 h0.8
  text "A10" at 83.998,92.735 h0.8
  text "A11" at 76.054,92.608 h0.8
  text "GND" at 74.371,91.44 h0.8
  text "GND" at 83.922,90.805 h0.8
  text "GND" at 75.654,90.068 h0.8
  text "5V" at 113.36,89.027 h0.8
  text "C7" at 74.371,86.512 h0.8
  text "A0" at 113.068,86.487 h0.8
  text "3V" at 101.702,85.42 h0.8
  text "GND" at 106.324,79.578 h0.8
  text "5V" at 82.194,79.4 h0.8
Bottom Overlay:
  text "C8" at 90.043,99.593 h0.8
  text "C9" at 90.018,97.053 h0.8
  text "GND" at 90.78,94.971 h0.8
  text "3V" at 90.145,91.999 h0.8
  text "GND" at 106.561,86.589 h0.8 r90
  text "GND" at 109.118,86.589 h0.8 r90
  text "GND" at 86.724,85.827 h0.8 r90
  text "GND" at 89.281,85.827 h0.8 r90
  text "3V" at 101.448,85.789 h0.8 r90
  text "3V" at 104.005,85.789 h0.8 r90
  text "5V" at 81.61,85.027 h0.8 r90
  text "5V" at 84.167,85.027 h0.8 r90